# EAGLE board arm_new - Copy (EAGLE 7.5.0)
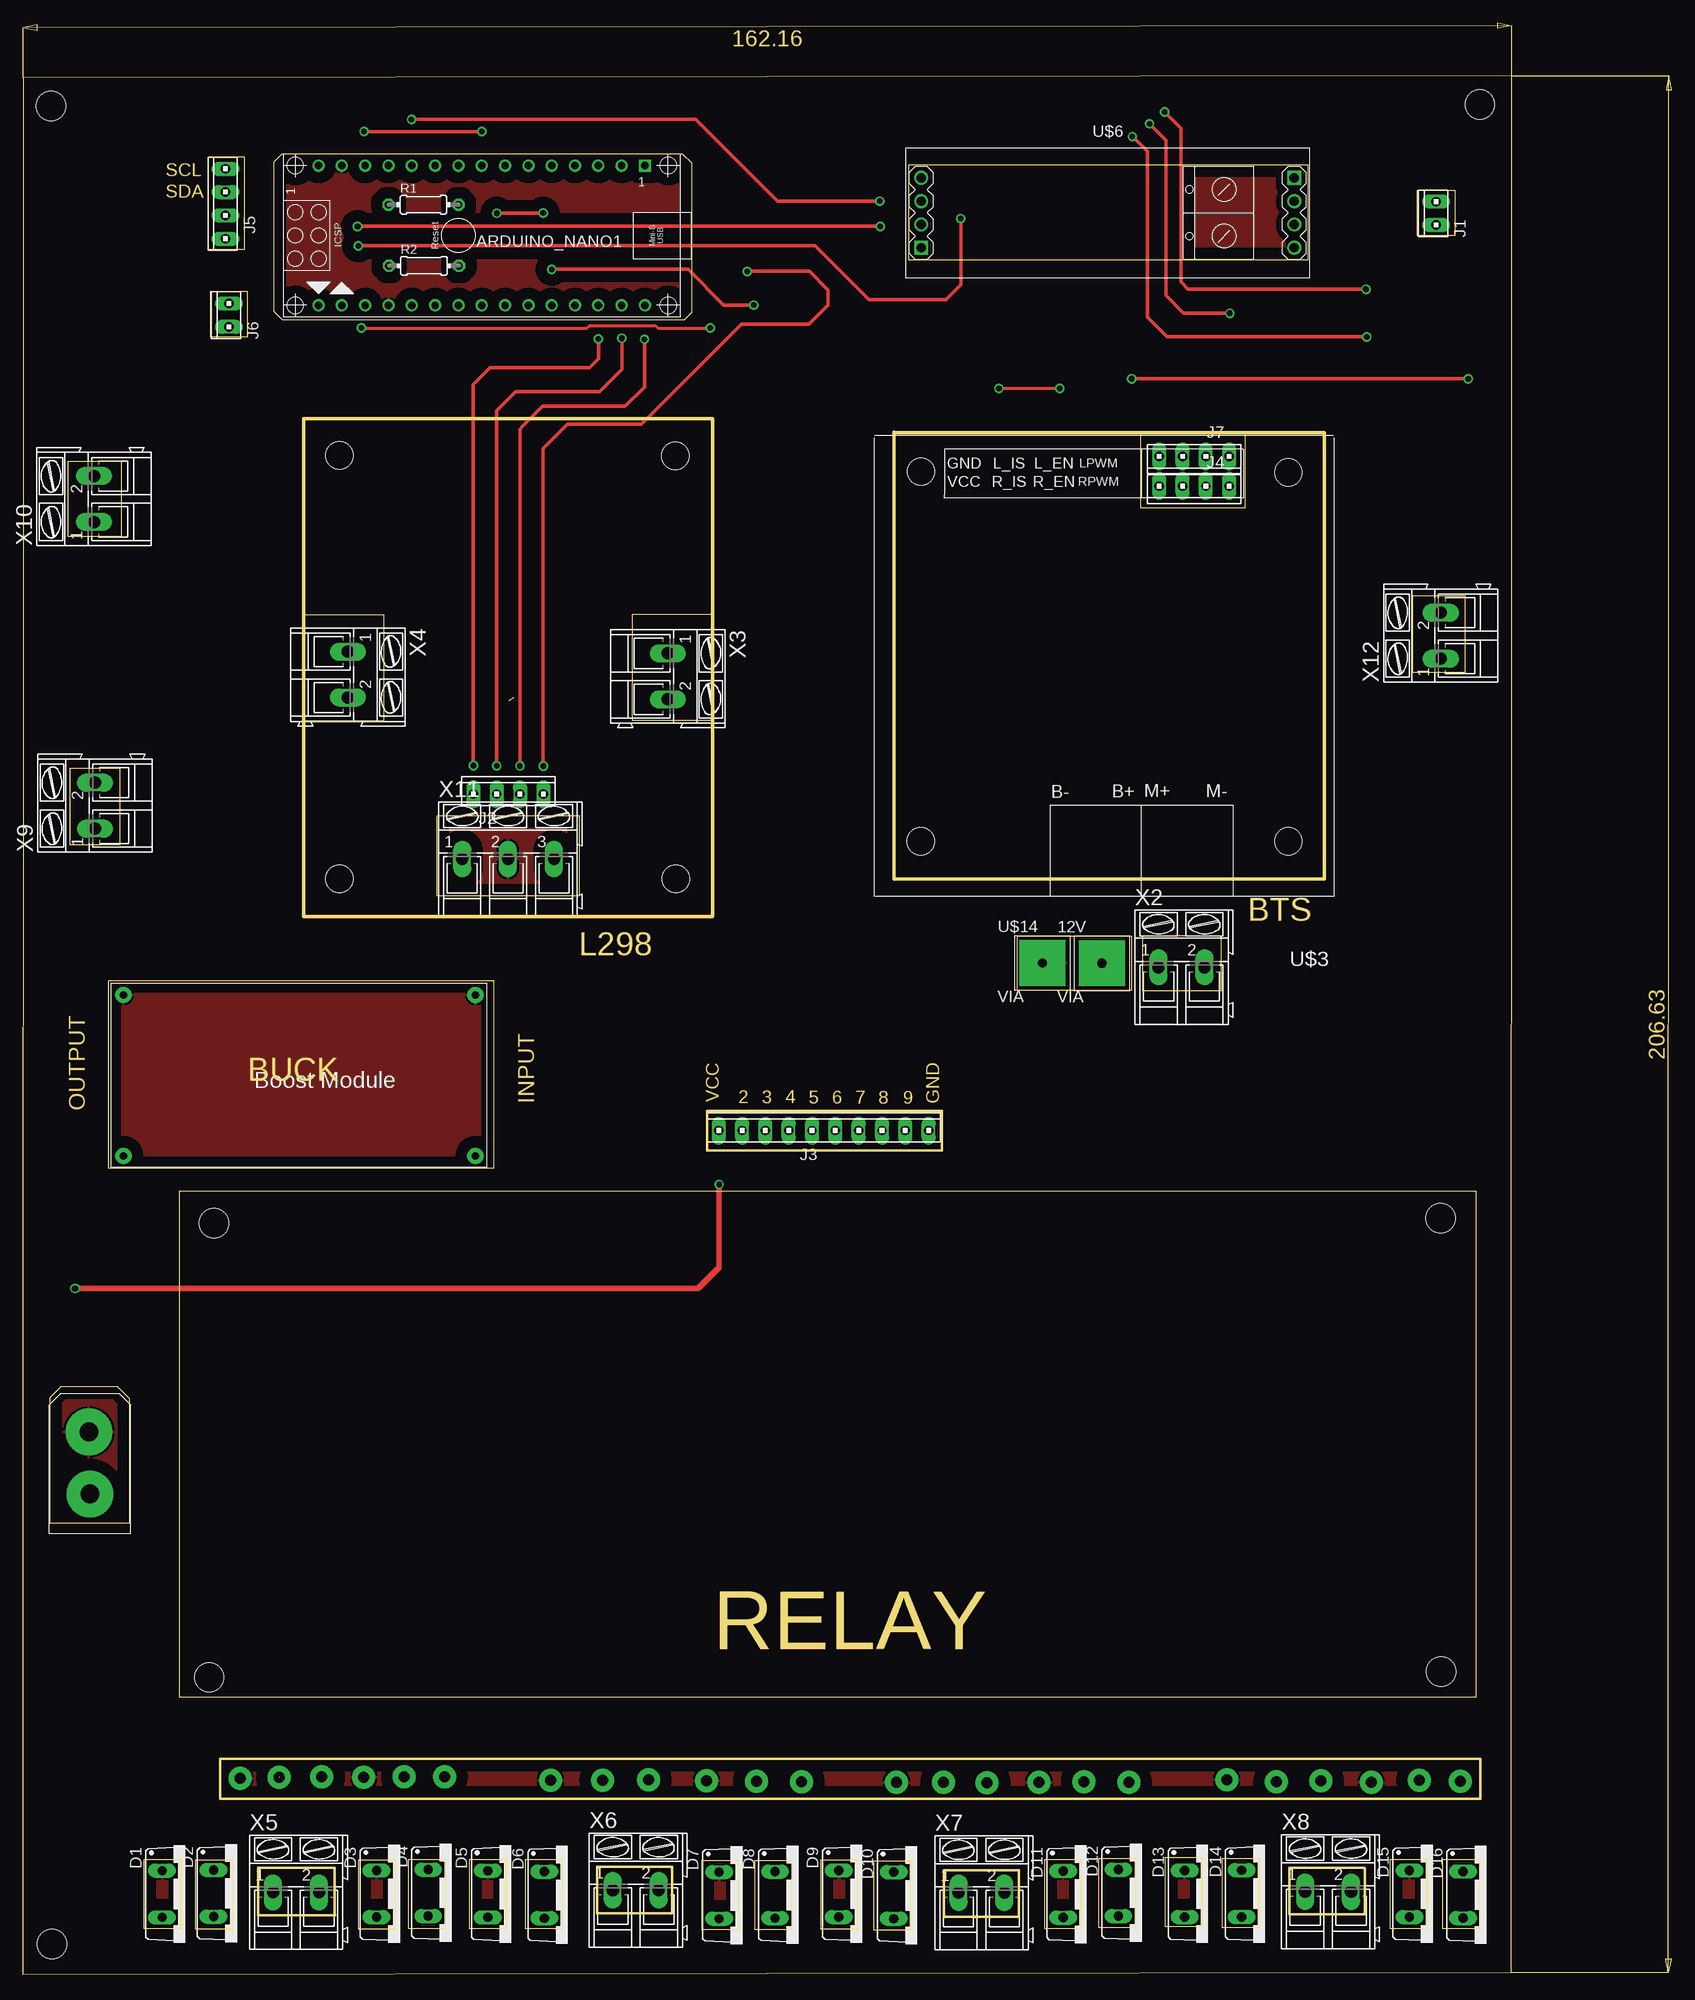
[diagram p0: board, top side]
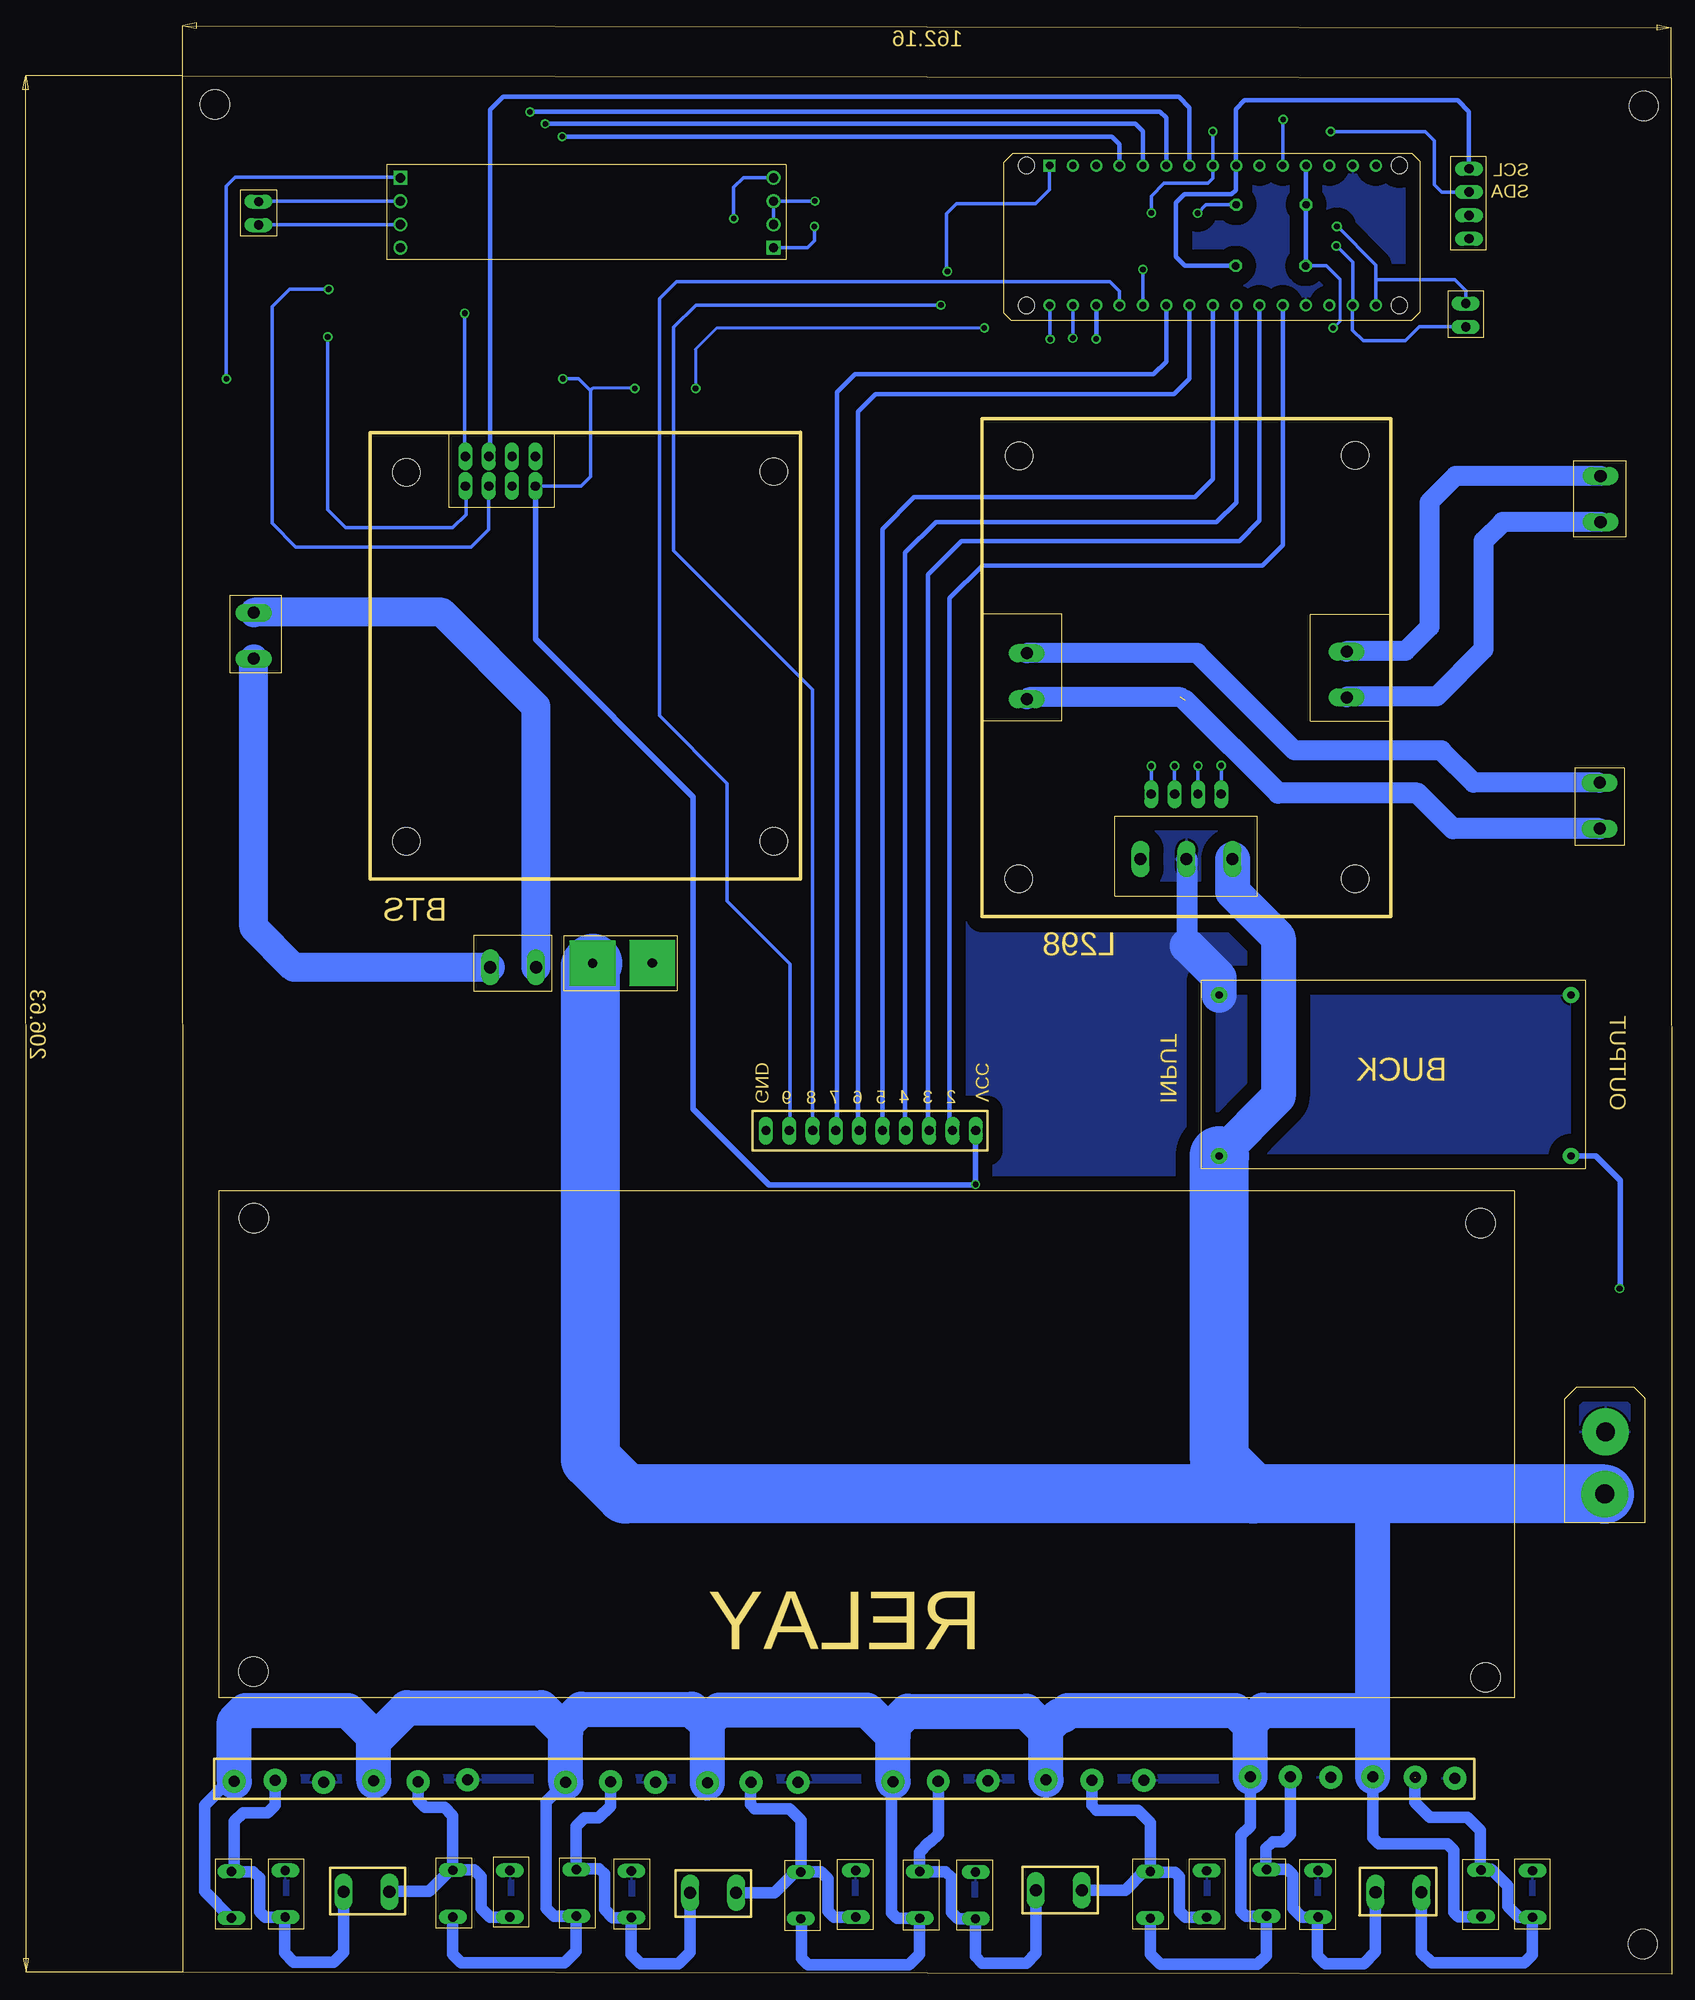
[diagram p1: board, bottom side, seen from below]

Size 162.21 x 206.83 mm. Coordinates in mm from the lower left corner, seen from the top.
Outline: 95.1,167.97 141.78,167.97 141.78,119.33 94.92,119.33 94.92,168.02
Outline: 25.71,11.61 33.98,11.61 33.98,6.45
Outline: 34.01,6.43 25.63,6.43 25.63,11.61
Outline: 70.71,11.68 62.54,11.68 62.54,6.66 70.74,6.66 70.74,11.66
Outline: 108.51,11.3 100.33,11.3 100.33,6.27 108.53,6.27 108.53,11.28
Outline: 146.15,11.58 137.97,11.58 137.97,6.55 146.18,6.55 146.18,11.56
Outline: 2.92,62.76 4.14,63.98 10.34,63.98 11.66,62.66 11.66,49.15 2.92,49.15 2.92,62.74 2.95,62.76
Outline: 28.27,198.35 71.81,198.35 72.82,197.33 72.82,181 72.01,180.19 28.3,180.19 27.36,181.13 27.36,197.46 28.25,198.35
Outline: 121.79,167.82 121.77,167.82 121.77,159.77 133.17,159.77 133.17,167.87
Outline: 17.12,85.34 158.32,85.34 158.32,30.18 17.07,30.18 17.07,85.34
Outline: 5.16,131.42 10.57,131.42 10.57,123.01 5.13,123.01 5.13,131.42
Outline: 152.04,150.19 157.1,150.19 157.1,141.83 151.44,141.83 151.44,150.22 152.02,150.22
Outline: 0,0 162.16,0.2 162.21,206.83 0.05,206.63 0,0
Outline: 30.58,169.49 75.13,169.49 75.13,115.21 30.58,115.21 30.58,169.49
Outline: 74.55,94.06 100.15,94.06 100.15,89.74 74.55,89.74 74.55,94.06
Outline: 21.51,23.47 158.78,23.47 158.78,19.1 21.51,19.1 21.51,23.47
Outline: 13.21,12.52 17.17,12.52 17.17,4.95 13.21,4.95 13.21,12.52
Outline: 18.85,12.47 22.81,12.47 22.81,4.9 18.85,4.9 18.85,12.47
Outline: 36.6,12.47 40.56,12.47 40.56,4.9 36.6,4.9 36.6,12.47
Outline: 42.01,12.52 45.97,12.52 45.97,4.95 42.01,4.95 42.01,12.52
Outline: 48.64,12.52 52.6,12.52 52.6,4.95 48.64,4.95 48.64,12.52
Outline: 54.76,12.52 58.73,12.52 58.73,4.95 54.76,4.95 54.76,12.52
Outline: 73.96,12.39 77.93,12.39 77.93,4.83 73.96,4.83 73.96,12.39
Outline: 158.67,4.93 154.71,4.93 154.71,12.5 158.67,12.5 158.67,4.93
Outline: 148.97,12.52 152.93,12.52 152.93,4.95 148.97,4.95 148.97,12.52
Outline: 79.78,12.42 83.74,12.42 83.74,4.85 79.78,4.85 79.78,12.42
Outline: 86.97,12.47 90.93,12.47 90.93,4.9 86.97,4.9 86.97,12.47
Outline: 92.71,12.37 96.67,12.37 96.67,4.8 92.71,4.8 92.71,12.37
Outline: 111.33,12.52 115.29,12.52 115.29,4.95 111.33,4.95 111.33,12.52
Outline: 117.25,12.65 121.21,12.65 121.21,5.08 117.25,5.08 117.25,12.65
Outline: 124.46,12.75 128.42,12.75 128.42,5.18 124.46,5.18 124.46,12.75
Outline: 130.71,12.62 134.67,12.62 134.67,5.05 130.71,5.05 130.71,12.62
Outline: 96.47,197.16 140,197.16 140,186.79 96.47,186.79 96.47,197.16
Outline: 20.22,197.99 24.11,197.99 24.11,187.91 20.22,187.91 20.22,197.99
Outline: 20.45,183.34 24.41,183.34 24.41,178.33 20.45,178.33 20.45,183.34
Outline: 151.94,194.36 155.98,194.36 155.98,189.43 151.94,189.43 151.94,194.36
Outline: 108.33,113.13 120.75,113.13 120.75,107.16 108.33,107.16 108.33,113.13
Outline: 122,113.16 130.5,113.16 130.5,107.11 122,107.11 122,113.16
Outline: 4.93,164.87 10.69,164.87 10.69,156.64 4.93,156.64 4.93,164.87
Outline: 9.35,108.28 51.28,108.28 51.28,87.78 9.35,87.78 9.35,108.28
Copper layers (1*16): Top 0.035mm / dielectric 1.5mm / Bottom 0.035mm
Design rules "default": minimum track width 10mil, minimum drill 24mil, track to track 8mil, track to pad 8mil, pad to pad 8mil, via to via 8mil, smd to smd 8mil, copper to edge 40mil, drill to drill 8mil, minimum pad ring 10mil, minimum via ring 8mil, stop-mask expansion 4mil, vias tented up to drill 0mil, thermal gap 10mil
Holes 3.2 mm at 154.46,82.36 154.51,32.97 20.28,32.36 20.82,81.82 3.05,203.53 158.72,203.71 3.15,3.28

## Footprints (pad centres in the part's own frame; a part is rotated, then mirrored left to right if it is on the bottom)
VIA = drill 1 pad 5 square: P$1 -4,3
ARDUINO_NANO = drill 0.8 square: 1 -20.32,-7.62 | drill 0.8: 2 -17.78,-7.62; 3 -15.24,-7.62; 4 -12.7,-7.62; 5 -10.16,-7.62; 6 -7.62,-7.62; 7 -5.08,-7.62; 8 -2.54,-7.62; 9 0,-7.62; 10 2.54,-7.62; 11 5.08,-7.62; 12 7.62,-7.62; 13 10.16,-7.62; 14 12.7,-7.62; 15 15.24,-7.62; 16 15.24,7.62; 17 12.7,7.62; 18 10.16,7.62; 19 7.62,7.62; 20 5.08,7.62; 21 2.54,7.62; 22 0,7.62; 23 -2.54,7.62; 24 -5.08,7.62; 25 -7.62,7.62; 26 -10.16,7.62; 27 -12.7,7.62; 28 -15.24,7.62; 29 -17.78,7.62; 30 -20.32,7.62 | hole 1.778: -22.86,-7.62; -22.86,7.62; 17.78,7.62; 17.78,-7.62
TO220ACS = drill 1.016 long: A 2.54,-2.54; C -2.54,-2.54
10X02MTA = drill 1.016 long: 1 1.27,0; 2 -1.27,0
10X04MTA = drill 1.016 long: 1 3.81,0; 2 1.27,0; 3 -1.27,0; 4 -3.81,0
10X10MTA = drill 1.016 long: 1 11.43,0; 2 8.89,0; 3 6.35,0; 4 3.81,0; 5 1.27,0; 6 -1.27,0; 7 -3.81,0; 8 -6.35,0; 9 -8.89,0; 10 -11.43,0
ROUND_VIA = drill 1.2 pad 2.5: P$1 0,0
0204/7 = drill 0.813 octagon: 1 -3.81,0; 2 3.81,0
BOOST_MODULE = drill 0.8 pad 1.778: IN+ 1.27,18.796; IN- 1.27,1.27; OUT+ 39.624,18.796; OUT- 39.624,1.27
CONNECTOR = drill 2.032 pad 5.08: P$1 4.343,12.294; P$2 4.445,5.537
IBT-2 = hole 3: -8.001,12.954; 32.055,12.954; 32.029,-27.305; -8.001,-27.203
L298 = hole 3: 52.324,40.665; 52.273,4.064; 6.198,40.665; 6.223,3.988
RS485-TTL-CONVERTER = drill 1 square: J1.1 -20.32,-3.81; J2.1 20.32,3.81 | drill 1: J1.2 -20.32,-1.27; J1.3 -20.32,1.27; J1.4 -20.32,3.81; J2.2 20.32,1.27; J2.3 20.32,-1.27; J2.4 20.32,-3.81
AK300/2 = drill 1.321 long: 1 -2.515,0; 2 2.489,0
AK300/3 = drill 1.321 long: 1 -5.004,0; 2 0,0; 3 5.004,0

## Placement (x,y rotation side)
12V  VIA  [VIA]  121.56,107.14 0 top
ARDUINO_NANO1  [ARDUINO_NANO]  47.45,189.43 180 top
D1  MUR810  [TO220ACS]  17.7,8.74 270 top
D2  MUR810  [TO220ACS]  23.32,8.81 270 top
D3  MUR810  [TO220ACS]  41.07,8.76 270 top
D4  MUR810  [TO220ACS]  46.69,8.86 270 top
D5  MUR810  [TO220ACS]  53.19,8.74 270 top
D6  MUR810  [TO220ACS]  59.33,8.64 270 top
D7  MUR810  [TO220ACS]  78.38,8.58 270 top
D8  MUR810  [TO220ACS]  84.48,8.64 270 top
D9  MUR810  [TO220ACS]  91.44,8.76 270 top
D10  MUR810  [TO220ACS]  97.41,8.58 270 top
D11  MUR810  [TO220ACS]  115.87,8.71 270 top
D12  MUR810  [TO220ACS]  121.89,8.86 270 top
D13  MUR810  [TO220ACS]  129.11,8.76 270 top
D14  MUR810  [TO220ACS]  135.33,8.79 270 top
D15  MUR810  [TO220ACS]  153.59,8.76 270 top
D16  MUR810  [TO220ACS]  159.46,8.66 270 top
J1  [10X02MTA]  153.95,191.85 90 top
J2  [10X04MTA]  52.88,128.57 0 top
J3  [10X10MTA]  87.25,91.92 0 top
J4  [10X04MTA]  127.61,162.13 180 top
J5  [10X04MTA]  22.07,192.89 90 top
J6  [10X02MTA]  22.43,180.75 90 top
J7  [10X04MTA]  127.61,165.38 180 top
NO  NO  [ROUND_VIA]  37.13,21.44 0 top
NO1  NO  [ROUND_VIA]  57.48,21.13 0 top
NO2  NO  [ROUND_VIA]  95.17,20.93 0 top
NO3  NO  [ROUND_VIA]  131.17,21.18 0 top
R1  4.7K  [0204/7]  43.64,192.79 0 top
R2  4.7K  [0204/7]  43.69,186.13 0 top
U$1  BOOST_MODULE  [BOOST_MODULE]  50.57,107.95 180 top
U$2  XT60  [CONNECTOR]  2.84,46.79 0 top
U$3  [IBT-2]  129.87,136.4 180 top
U$4  [L298]  75.13,113.13 90 top
U$6  RS485-TTL-CONVERTER  [RS485-TTL-CONVERTER]  118.19,191.9 0 top
U$14  VIA  [VIA]  115.06,107.16 0 top
U$17  ROUND_VIA  [ROUND_VIA]  63.17,21.13 0 top
U$18  ROUND_VIA  [ROUND_VIA]  27.94,21.46 0 top
U$19  ROUND_VIA  [ROUND_VIA]  32.56,21.51 0 top
U$20  ROUND_VIA  [ROUND_VIA]  23.65,21.34 0 top
U$21  ROUND_VIA  [ROUND_VIA]  41.55,21.51 0 top
U$22  ROUND_VIA  [ROUND_VIA]  45.92,21.49 0 top
U$23  ROUND_VIA  [ROUND_VIA]  84.84,20.98 0 top
U$24  ROUND_VIA  [ROUND_VIA]  74.47,21.08 0 top
U$25  ROUND_VIA  [ROUND_VIA]  79.91,21.01 0 top
U$26  ROUND_VIA  [ROUND_VIA]  68.15,21.16 0 top
U$27  ROUND_VIA  [ROUND_VIA]  100.3,20.93 0 top
U$28  ROUND_VIA  [ROUND_VIA]  120.5,20.9 0 top
U$29  ROUND_VIA  [ROUND_VIA]  110.69,20.93 0 top
U$30  ROUND_VIA  [ROUND_VIA]  115.62,20.98 0 top
U$31  ROUND_VIA  [ROUND_VIA]  105.05,20.85 0 top
U$32  ROUND_VIA  [ROUND_VIA]  136.58,20.95 0 top
U$33  ROUND_VIA  [ROUND_VIA]  141.4,21.06 0 top
U$34  ROUND_VIA  [ROUND_VIA]  146.89,20.93 0 top
U$35  ROUND_VIA  [ROUND_VIA]  152.15,21.11 0 top
U$36  ROUND_VIA  [ROUND_VIA]  156.59,21.01 0 top
X2  [AK300/2]  126.24,109.7 0 top
X3  [AK300/2]  70.26,141.4 270 top
X4  [AK300/2]  35.41,141.58 270 top
X5  [AK300/2]  29.77,8.92 0 top
X6  [AK300/2]  66.78,9.14 0 top
X7  [AK300/2]  104.44,8.86 0 top
X8  [AK300/2]  142.21,8.99 0 top
X9  [AK300/2]  7.85,127.33 90 top
X10  [AK300/2]  7.75,160.73 90 top
X11  [AK300/3]  52.86,121.49 0 top
X12  [AK300/2]  154.48,145.85 90 top

## Library data of the parts
12V U$14 = via
ARDUINO_NANO1 = ArduinoNanoV30
D1-D16 = diode
J1-J7 = con-amp
NO NO1-NO3 U$17-U$36 = round_via
R1 R2 = rcl
U$1 = Boost Module
U$2 = xt60_V2
U$3 = bts
U$4 = l298_v2
U$6 = diy-modules
X2-X12 = con-ptr500; OC_FARNELL: unknown; OC_NEWARK: unknown

## Nets
5V: ARDUINO_NANO1.12 J3.10 J4.1 R1.1 R2.1 U$1.OUT+ U$6.J2.1
GND: ARDUINO_NANO1.14 ARDUINO_NANO1.19 D1.C D3.C D5.C D7.C D9.C D11.C D13.C D15.C J3.1 J5.3 J7.1 NO1.P$1 NO2.P$1 NO3.P$1 NO.P$1 U$1.IN- U$1.OUT- U$2.P$1 U$6.J2.4 U$14.P$1 U$20.P$1 U$24.P$1 U$29.P$1 U$34.P$1 X11.2
N$1: ARDUINO_NANO1.6 J4.3
N$2: ARDUINO_NANO1.4 J4.4
N$3: ARDUINO_NANO1.7 J7.3
N$4: ARDUINO_NANO1.5 J7.4
N$6: X3.2 X9.1
N$7: X4.1 X10.2
N$8: X4.2 X10.1
N$9: ARDUINO_NANO1.1 J2.1
N$10: D1.A D2.C U$18.P$1 X5.1
N$11: ARDUINO_NANO1.30 J2.2
N$12: ARDUINO_NANO1.20 J3.9
N$13: ARDUINO_NANO1.29 J2.3
N$14: ARDUINO_NANO1.28 J2.4
N$15: ARDUINO_NANO1.21 J3.8
N$16: ARDUINO_NANO1.22 J3.7
N$18: D5.A D6.C U$17.P$1 X6.1
N$19: ARDUINO_NANO1.23 J3.6
N$20: ARDUINO_NANO1.24 J3.5
N$21: ARDUINO_NANO1.25 J3.4
N$22: ARDUINO_NANO1.26 J3.3
N$23: ARDUINO_NANO1.27 J3.2
N$24: ARDUINO_NANO1.16 J6.1 U$6.J1.1
N$25: J1.1 U$6.J2.2
N$26: ARDUINO_NANO1.9 J5.1 R2.2
N$27: ARDUINO_NANO1.8 J5.2 R1.2
N$31: D9.A D10.C U$27.P$1 X7.1
N$32: D3.A D4.C U$21.P$1 X5.2
N$34: D7.A D8.C U$25.P$1 X6.2
N$35: D13.A D14.C U$32.P$1 X8.1
N$37: D11.A D12.C U$30.P$1 X7.2
N$39: 12V.P$1 D2.A D4.A D6.A D8.A D10.A D12.A D14.A D16.A U$1.IN+ U$2.P$2 U$19.P$1 U$22.P$1 U$23.P$1 U$26.P$1 U$28.P$1 U$31.P$1 U$33.P$1 U$36.P$1 X11.1
N$42: D15.A D16.C U$35.P$1 X8.2
N$43: X3.1 X9.2
N$47: ARDUINO_NANO1.17 J6.2 U$6.J1.4
N$48: ARDUINO_NANO1.11 U$6.J1.2 U$6.J1.3
N$49: J1.2 U$6.J2.3
N$55: X2.1 X12.2
N$56: X2.2 X12.1
VIN: ARDUINO_NANO1.15

## Tracks (layer width: path | path; a pad name or v marks a point on that pad's centre or on a via)
5V  (via drill 0.6)
  Top 0.305: v36.88,179.35 61.47,179.35 61.75,179.63 68.91,179.63 69.19,179.35 v74.88,179.35 | v106.35,172.77 v112.95,172.77
  Top 0.406: v120.8,173.81 v157.46,173.81 v157.48,173.81
  Top 0.61: v5.64,74.7 73.56,74.7 75.84,76.99 v75.84,86.03
  Bottom 0.305: 36.17,184.68 36.17,180.06 v36.88,179.35 | v74.88,179.35 104.04,179.35 106.35,177.04 v106.35,172.77 | v112.95,172.77 117.55,172.77 117.78,172.54
  Bottom 0.406: J4.1 118.8,162.13 117.78,163.14 117.78,172.54 119.07,173.84 120.78,173.84 v120.8,173.81 | v157.48,173.81 157.48,194.79 156.49,195.78 138.58,195.78 U$6.J2.1 | R2.1 37.62,186.13 36.17,184.68
  Bottom 0.508: ARDUINO_NANO1.12 R1.1 39.88,192.74 R2.1
  Bottom 0.61: 75.76,91.97 J3.10 75.84,91.89 v75.84,86.03 75.89,85.98 98.35,85.98 106.63,94.26 106.63,128.27 123.8,145.44 J4.1 | U$1.OUT+ 8.28,89.15 5.61,86.49 5.61,74.73 v5.64,74.7
GND
  Bottom 2.286: 52.78,112.06 52.78,121.41 X11.2
  Bottom 3.81: U$1.IN- 49.3,108.59 52.78,112.06
  pour Bottom (isolate 1.524): -2.77,206.81 162.33,206.81 162.18,0.2 -2.92,0.2
  pour Top (isolate 1.27): -2.92,217.37 163.45,217.37 163.45,0.2 -2.92,0.2
N$1  (via drill 0.6)
  Top 0.406: v124.38,202.9 126.14,201.14 126.14,184.38 126.95,183.57 v146.36,183.57
  Bottom 0.406: v146.36,183.57 150.6,183.57 152.5,181.66 152.5,158.09 149.91,155.5 130.78,155.5 128.91,157.38 128.91,162.1 J4.3
  Bottom 0.508: ARDUINO_NANO1.6 55.07,202.24 55.75,202.92 124.36,202.92 v124.38,202.9
N$2  (via drill 0.6)
  Top 0.406: v120.88,200.2 120.95,200.2 122.53,198.63 122.53,180.52 124.66,178.38 v146.41,178.38 v146.43,178.38
  Bottom 0.406: v146.43,178.38 146.43,159.56 144.45,157.58 132.79,157.58 131.37,159 131.37,162.08 J4.4
  Bottom 0.508: ARDUINO_NANO1.4 60.15,199.36 60.98,200.2 v120.88,200.2
N$3
  Bottom 0.508: ARDUINO_NANO1.7 52.53,203.35 53.7,204.52 127.33,204.52 128.73,203.12 128.73,165.53 J7.3
N$4  (via drill 0.6)
  Top 0.406: v122.73,201.6 124.51,199.82 124.51,182.91 126.44,180.97 v131.5,180.97
  Bottom 0.406: v131.5,180.97 131.5,165.46 J7.4
  Bottom 0.508: ARDUINO_NANO1.5 57.61,200.79 58.42,201.6 v122.73,201.6
N$6  (1 unrouted)
  Bottom 2.184: 53.52,139.14 70.03,139.14 X3.2
  Bottom 2.286: X9.1 23.82,124.81 27.69,128.68 42.88,128.68 52.98,138.78
N$7
  Bottom 2.184: X10.2 23.55,163.22 26.39,160.38 26.39,146.79 29.01,144.17 35.33,144.17 X4.1
N$8
  Bottom 2.184: X10.1 18.41,158.22 20.5,156.13 20.5,144.32 25.6,139.22 35.28,139.22 X4.2
N$9  (via drill 0.6)
  Top 0.406: v56.69,131.6 56.69,166.22 59.33,168.86 67.39,168.86 78.28,179.76 85.65,179.76 87.71,181.81 87.71,183.49 85.67,185.52 v78.89,185.52
  Bottom 0.406: J2.1 v56.69,131.6 | ARDUINO_NANO1.1 67.77,194.44 69.32,192.89 77.93,192.89 78.99,191.82 78.99,185.62 v78.89,185.52
N$10  (1 unrouted)
  Bottom 1.27: 27.96,21.44 27.96,18.72 26.34,17.09 22.28,17.09 20.85,15.67 20.85,11.43 | 20.85,11.43 D2.C | 20.85,11.43 19.66,11.43 17.86,9.63 17.86,7.42 16.64,6.2 D1.A 15.16,2.13 16.05,1.24 26.14,1.24 27.25,2.36 X5.1
N$11  (via drill 0.6)
  Top 0.406: v67.72,178.13 67.72,172.92 65.61,170.81 56.62,170.81 54.41,168.6 54.15,168.35 v54.15,131.62
  Bottom 0.406: v67.72,178.13 67.72,181.76 ARDUINO_NANO1.30 | J2.2 v54.15,131.62
N$12
  Bottom 0.508: ARDUINO_NANO1.20 42.37,155.7 44.6,153.47 75.11,153.47 78.66,149.91 78.66,92.23 J3.9
N$13  (via drill 0.6)
  Top 0.406: v51.61,131.65 51.61,170.36 53.7,172.44 62.81,172.44 65.25,174.88 v65.25,178.23
  Bottom 0.406: J2.3 v51.61,131.65 | v65.25,178.23 65.25,181.79 ARDUINO_NANO1.29
N$14  (via drill 0.6)
  Top 0.406: v62.69,178.16 62.71,178.13 62.71,176 61.72,175.01 50.88,175.01 49.07,173.2 v49.07,131.65
  Bottom 0.406: J2.4 v49.07,131.65
  Bottom 0.508: ARDUINO_NANO1.28 v62.69,178.16
N$15
  Bottom 0.508: ARDUINO_NANO1.21 44.91,158.34 47.09,156.16 77.39,156.16 81.05,152.5 81.05,92.08 J3.8
N$16
  Bottom 0.508: ARDUINO_NANO1.22 47.45,160.35 49.58,158.22 80.16,158.22 83.52,154.86 83.52,92 J3.7
N$18
  Bottom 1.27: D5.A 52.96,6.2 53.62,6.86 53.62,10.64 54.1,11.12 56.74,11.12 D6.C | D6.C 56.79,16.51 58.17,17.88 62.66,17.88 63.17,18.39 U$17.P$1 | D6.C 57.53,11.18 59.54,9.17 64.24,9.17 X6.1
N$19
  Bottom 0.508: ARDUINO_NANO1.23 49.99,162.87 51.94,160.91 82.55,160.91 86,157.45 86,91.95 J3.6
N$20
  Bottom 0.508: ARDUINO_NANO1.24 52.53,173.84 54.2,172.16 86.74,172.16 88.65,170.26 88.65,92.05 J3.5
N$21
  Bottom 0.508: ARDUINO_NANO1.25 55.07,175.69 56.44,174.32 89,174.32 90.96,172.36 90.96,92.02 J3.4
N$22  (via drill 0.6)
  Top 0.406: v79.63,181.84 76.35,181.84 72.44,185.75 v57.61,185.75
  Bottom 0.406: J3.3 93.59,139.95 108.74,155.09 108.74,179.43 106.3,181.86 79.65,181.86 v79.63,181.84 | v57.61,185.75 ARDUINO_NANO1.26
N$23
  Bottom 0.406: J3.2 96.06,92 96.06,110.06 102.92,116.92 102.92,129.74 110.29,137.11 110.29,182.52 108.41,184.4 61.21,184.4 60.15,183.34 ARDUINO_NANO1.27
N$24  (via drill 0.6)
  Top 0.406: v36.42,190.42 v93.4,190.42
  Bottom 0.406: ARDUINO_NANO1.16 32.21,184.71 | 32.21,184.71 32.21,186.21 v36.42,190.42 | J6.1 22.43,183.41 23.62,184.61 32.11,184.61 32.21,184.71 | v93.4,190.42 93.4,188.85 94.16,188.09 U$6.J1.1
N$25
  Bottom 0.406: U$6.J2.2 153.9,193.17 J1.1
N$26
  Bottom 0.508: R2.2 53.01,186.13 54.03,187.15 54.03,192.99 53.11,193.9 47.95,193.9 47.47,194.39 47.47,197.03 ARDUINO_NANO1.9 47.5,197.1 47.5,203.17 46.53,204.14 23.32,204.14 22.07,202.9 J5.1
N$27  (via drill 0.6)
  Top 0.406: v37.16,200.76 v49.99,200.76 | v51.64,191.87 v56.69,191.87
  Bottom 0.406: J5.2 25.02,194.16 25.83,194.97 25.83,199.77 26.82,200.76 v37.16,200.76 | v49.99,200.76 ARDUINO_NANO1.8 49.99,195.68 50.55,195.12 55.3,195.12 56.69,193.73 v56.69,191.87 | R1.2 50.72,192.79 v51.64,191.87
N$31
  Bottom 1.27: D9.A 91.26,6.22 91.92,6.88 91.92,10.41 92.66,11.15 94.84,11.15 D10.C | D10.C 94.87,16.79 96.11,18.03 99.9,18.03 100.38,18.52 100.38,20.85 U$27.P$1 | D10.C 95.53,11.12 97.77,8.89 101.9,8.89 X7.1
N$32
  Bottom 1.27: X5.2 32.26,2.44 33.55,1.14 37.72,1.14 38.61,2.03 38.61,6.15 D3.A 40.28,6.22 41.25,7.19 41.25,10.82 41.86,11.43 44.12,11.43 D4.C 44.2,11.46 44.2,13.72 43.46,14.45 42.37,14.45 41.55,15.26 U$21.P$1
N$34
  Bottom 1.27: X6.2 69.27,2.26 70.31,1.22 75.13,1.22 75.87,1.96 75.87,6.02 D7.A 77.77,6.04 78.49,6.76 78.49,10.54 79.12,11.18 D8.C 81.94,13.31 80.9,14.35 80.8,14.35 79.91,15.24 U$25.P$1
N$35
  Bottom 1.27: D13.A 128.75,6.22 129.69,7.16 129.69,10.59 130.48,11.38 132.74,11.38 D14.C | D14.C 132.79,17.27 133.71,18.19 135.81,18.19 136.58,18.95 U$32.P$1 | D14.C 133.07,11.33 135.36,9.04 139.65,9.04 X8.1
N$37
  Bottom 1.27: X7.2 106.93,2.39 108.18,1.14 112.32,1.14 113.36,2.18 113.36,6.15 D11.A 115.39,6.17 116.28,7.06 116.28,10.92 116.84,11.48 119.28,11.48 D12.C 119.35,16.1 118.41,17.04 116.89,17.04 115.62,18.31 U$30.P$1
N$39
  Bottom 1.27: D2.A 23.27,6.27 23.75,6.76 23.75,13.51 24.46,14.22 31.9,14.22 32.54,14.86 32.54,21.49 U$19.P$1 | U$22.P$1 45.92,16.13 46.94,15.11 46.94,6.83 46.41,6.3 44.17,6.3 D4.A 44.15,2.03 45.11,1.07 55.7,1.07 56.79,2.16 D6.A | D10.A 94.82,5.99 94.82,1.73 94.11,1.02 83.08,1.02 81.94,2.16 D8.A 84.38,6.1 84.99,6.71 84.99,20.83 U$23.P$1 | U$28.P$1 122.63,18.77 122.63,7.19 121.77,6.32 D12.A 119.35,2.49 120.6,1.24 131.88,1.24 132.82,2.18 132.82,6.22 D14.A | U$36.P$1 157.25,21.01 159.84,18.41 159.84,9.04 D16.A
  Bottom 3.81: X11.1 47.85,117.93 42.85,112.93 42.85,95.61 U$1.IN+ 49.33,89.13 | U$19.P$1 32.56,28.42 | 32.56,28.42 32.56,50.98 32.38,51.16 32.38,51.69 33.02,52.32 | U$22.P$1 45.92,27.08 | 45.92,27.08 45.92,27.38 44.53,28.78 32.92,28.78 32.56,28.42 | U$26.P$1 68.15,26.47 | 68.15,26.47 68.15,26.75 66.7,28.19 66.32,28.19 65.79,28.73 47.57,28.73 45.92,27.08 | U$23.P$1 84.84,25.96 | 84.84,25.96 84.84,27.05 83.24,28.65 70.33,28.65 68.15,26.47 | U$31.P$1 105.05,27.15 | 105.05,27.15 105.05,27.51 103.76,28.8 87.68,28.8 84.84,25.96 | U$28.P$1 120.5,26.39 | 120.5,26.39 120.5,27.18 118.8,28.88 106.78,28.88 105.05,27.15 | U$33.P$1 141.4,25.43 141.17,25.65 | 141.17,25.65 137.8,29.03 123.14,29.03 120.5,26.39 | U$36.P$1 156.59,27.53 155.4,28.73 144.25,28.73 141.17,25.65
  Bottom 6.452: U$2.P$2 33.02,52.32 45.62,52.32 | 45.62,52.32 49.25,55.96 49.25,89.1 U$1.IN+ | 45.62,52.32 113.99,52.32 117.8,56.13 117.8,109.9 12V.P$1
N$41  (via drill 0.6)
  other vias: 5.71,74.7
N$42
  Bottom 1.27: X8.2 144.7,2.41 145.8,1.32 150.11,1.32 151.11,2.31 151.11,6.17 D15.A 153.26,6.22 153.85,6.81 153.85,10.49 154.53,11.18 156.9,11.18 D16.C 156.59,11.53 156.59,16.66 155.65,17.6 152.96,17.6 152.15,18.41 U$35.P$1
N$43
  Bottom 2.184: X9.2 21.57,129.82 25.07,133.32 41.1,133.32 51.71,143.94 70.23,143.94 X3.1
N$44  (via drill 0.6)
  other vias: 75.84,86.06
N$47  (via drill 0.6)
  Top 0.406: v36.52,188.31 86.28,188.31 92.18,182.42 100.56,182.42 102.18,184.05 v102.18,191.26
  Bottom 0.406: v36.52,188.31 34.75,186.54 ARDUINO_NANO1.17 34.77,181.79 34.77,179.12 33.6,177.95 29.03,177.95 27.51,179.48 J6.2 | v102.18,191.26 102.18,194.66 101.14,195.71 U$6.J1.4
N$48  (via drill 0.6)
  Top 0.406: v93.34,193.17 82.19,193.17 73.28,202.08 v42.34,202.08
  Bottom 0.406: U$6.J1.2 U$6.J1.3 v93.34,193.17 | v42.34,202.08 42.34,197.08 ARDUINO_NANO1.11
N$49
  Bottom 0.406: U$6.J2.3 153.9,190.63 J1.2
N$55
  Bottom 3.175: X2.1 123.72,138.12 133.99,148.39 154.43,148.39 X12.2
N$56
  Bottom 3.175: X2.2 150.11,109.7 154.48,114.07 X12.1
S$4  (via drill 0.6)
  other vias: 42.34,202.06
S$5  (via drill 0.6)
  other vias: 36.55,188.29
S$6  (via drill 0.6)
  other vias: 36.5,190.42
S$8  (via drill 0.6)
  other vias: 79.6,181.84
S$9  (via drill 0.6)
  other vias: 57.61,185.72
S$10  (via drill 0.6)
  other vias: 49.07,131.7
S$11  (via drill 0.6)
  other vias: 51.61,131.65
S$12  (via drill 0.6)
  other vias: 54.15,131.65
S$13  (via drill 0.6)
  other vias: 56.69,131.65
S$14  (via drill 0.6)
  other vias: 65.23,178.26
S$15  (via drill 0.6)
  other vias: 78.92,185.5
S$17  (via drill 0.6)
  other vias: 131.5,180.95
S$19  (via drill 0.6)
  other vias: 120.8,173.84
S$20  (via drill 0.6)
  other vias: 36.88,179.37
S$21  (via drill 0.6)
  other vias: 106.32,172.77
S$22  (via drill 0.6)
  other vias: 146.3,183.59
S$23  (via drill 0.6)
  other vias: 51.64,191.85
S$24  (via drill 0.6)
  other vias: 56.67,191.9

## Text on the board
Dimension: SCL | SDA | BTS | L298 | BUCK | INPUT | VCC | 2 | 3 | 4 | 5 | 6 | 7 | 8 | 9 | GND | OUTPUT | RELAY